# Altium PCB PCB1.PcbDoc
Units mm, origin at the board's own origin, x right, y up, seen from the top; angles counter-clockwise.
Board outline 56.77 x 39.37 mm, 2 copper layers (Top Layer, Bottom Layer); 26 components, 17 nets, 96 pads, 7 vias.
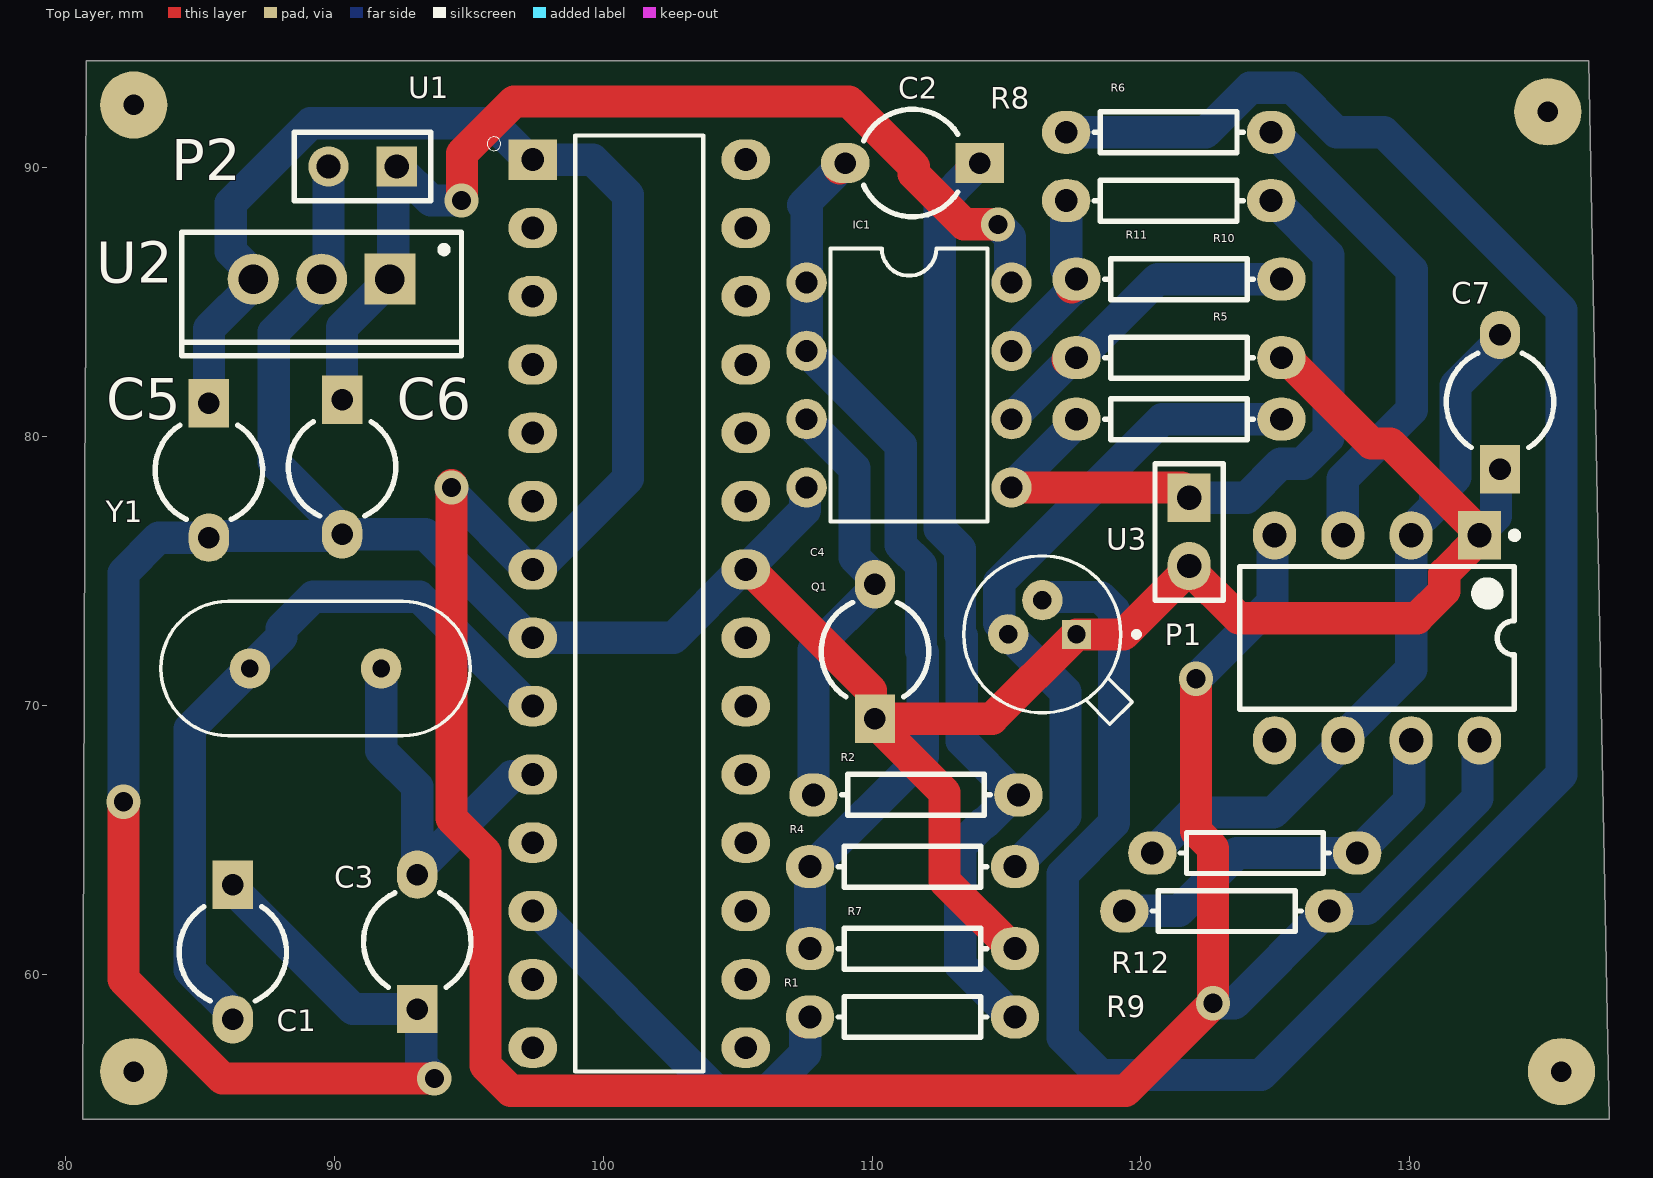
[diagram p0: Top Layer view]
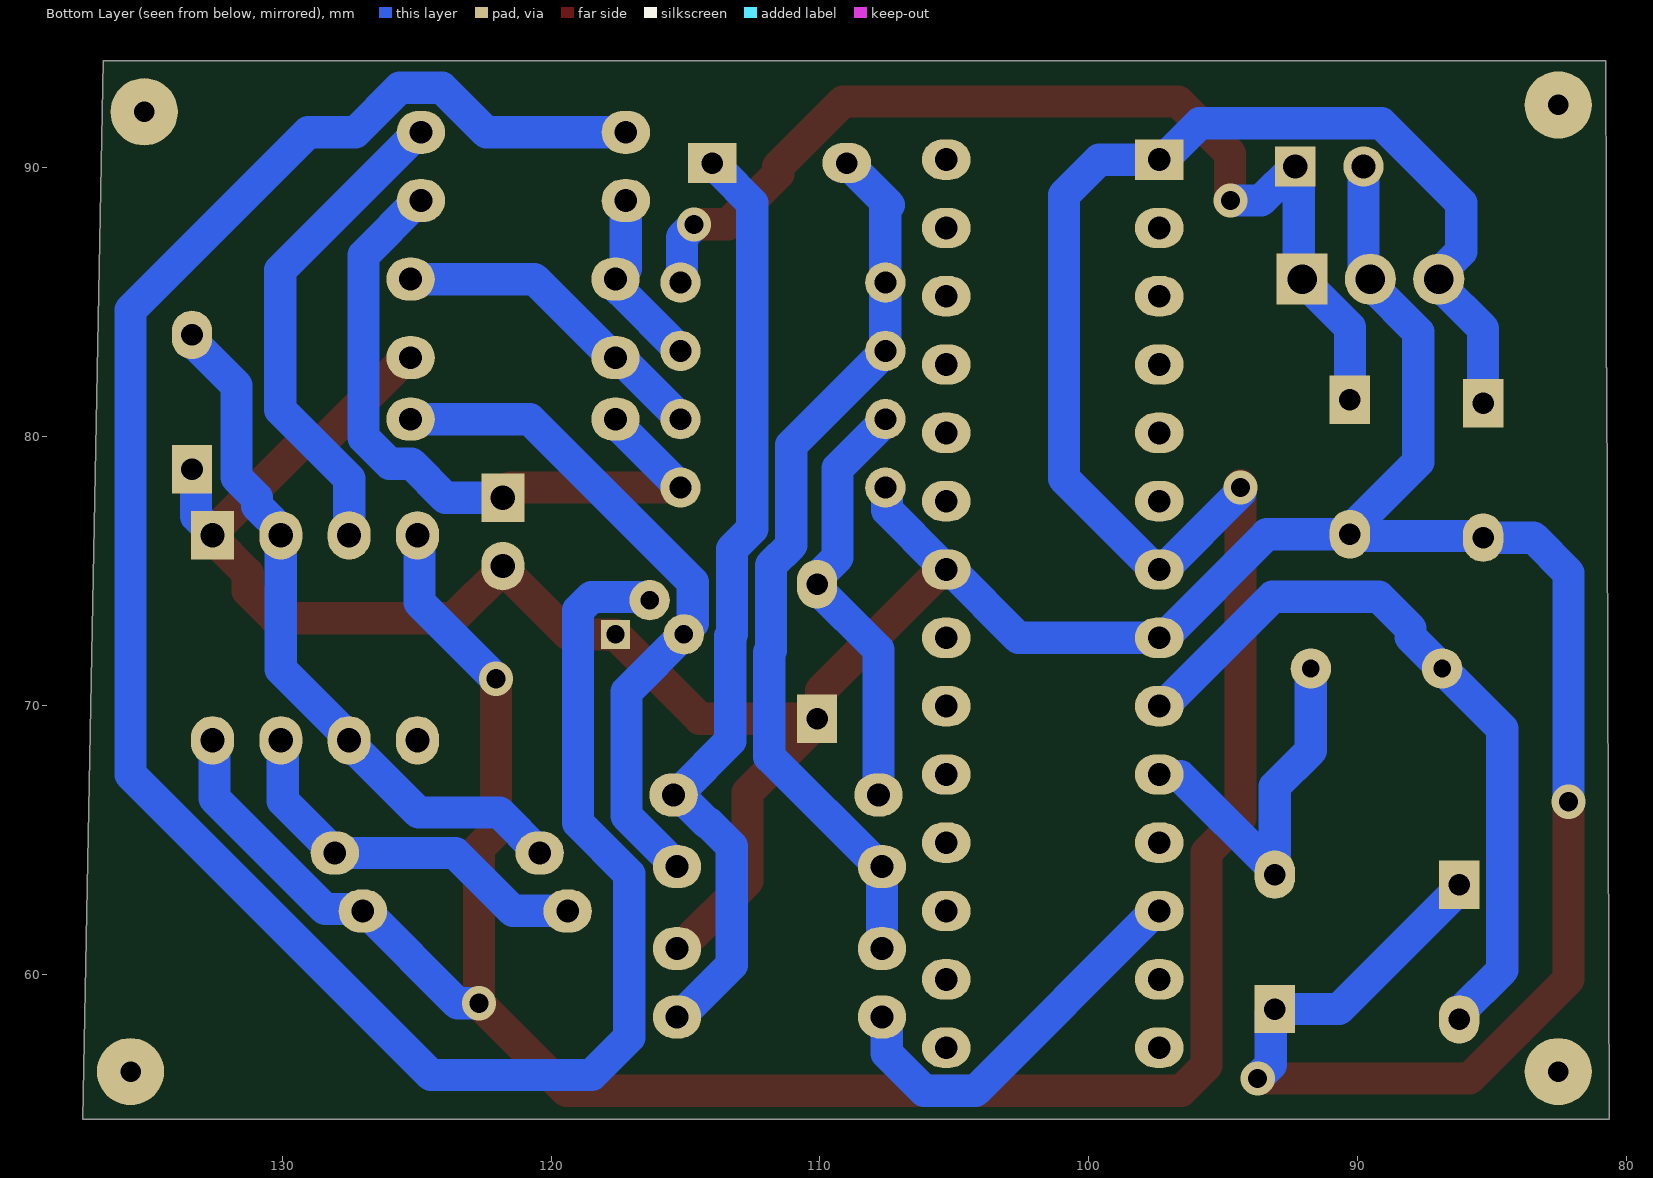
[diagram p1: Bottom Layer view, seen from below]

## Layer stack, top to bottom
Top Solder: solder mask 0.0102, Solder Resist, Dk 3.5
Top Layer: signal copper 0.0356
Dielectric 1: dielectric 0.32, FR-4, Dk 4.8
Bottom Layer: signal copper 0.0356
Bottom Solder: solder mask 0.0102, Solder Resist, Dk 3.5

## Board outline
80.757,88.392 80.757,82.565 80.738,82.55 80.647,54.61 137.419,54.61 136.657,93.98 80.775,93.98

## Design rules (kind name [scope] priority, off if disabled: settings)
Clearance [All] p1: gap=0.254 ignorepadtopadclearanceinfootprint=FALSE except(0: Arc-Hole Track-Hole SMDPad-Hole THPad-Hole Via-Hole Fill-Hole Poly-Hole Region-Hole Text-Hole)
PolygonConnect [All] p1: connectstyle=Relief reliefconductorwidth=0.254 reliefentries=4 polygonreliefangle="90 Angle" airgapwidth=0.254
RoutingVias [All] p1: holewidth=0.711 width=1.27 viastyle="Through Hole" minholewidth=0.711 minwidth=1.27 maxholewidth=0.711 maxwidth=1.27
SolderMaskExpansion [All] p1: expansion=0.102 istentingtop=FALSE
Width [All] p1: maxlimit=1.2 minlimit=1.2 preferedwidth=1.2
30 further rules are at their usual default settings.

## Components (designator, comment, footprint, x,y, rotation, side; value= is the part's Value field where it differs from the comment)
C1 "Cap2" CAPR5-4X5 86.233,60.833 r270 top value=22pF
C2 "Cap2" CAPR5-4X5 111.506,90.17 r180 top value=1uF
C3 "Cap2" CAPR5-4X5 93.091,61.214 r90 top value=22pF
C4 "Cap2" CAPR5-4X5 110.109,72.009 r90 top value=1uF
C5 "Cap2" CAPR5-4X5 85.344,78.74 r270 top value=100nF
C6 "Cap2" CAPR5-4X5 90.297,78.867 r270 top value=330nF
C7 "Cap2" CAPR5-4X5 133.35,81.28 r90 top value=10nF
IC1 "LM358" *DIL08 111.379,81.915 r270 top
P1 "Header 2" HDR1X2#1 121.793,77.724 r270 top
P2 "Header 2" HDR1X2#2 92.329,90.043 r180 top
Q1 "2N2222" TO127P584H533-3 116.332,72.644 r180 top
R1 "Res1" AXIAL-0.3 111.506,58.42 r0 top value=33K
R2 "Res1" AXIAL-0.3 111.633,66.675 r180 top value=33K
R4 "Res1" AXIAL-0.3 111.506,64.008 r0 top value=1K
R5 "Res1" AXIAL-0.3 121.412,80.645 r180 top value=1K
R6 "Res1" AXIAL-0.3 121.031,88.773 r180 top value=1K
R7 "Res1" AXIAL-0.3 111.506,60.96 r180 top value=1K
R8 "Res1" AXIAL-0.3 121.031,91.313 r180 top value=100
R9 "Res1" AXIAL-0.3 123.19,62.357 r0 top value=1K
R10 "Res1" AXIAL-0.3 121.412,82.931 r180 top value=1K
R11 "Res1" AXIAL-0.3 121.412,85.852 r180 top value=1K
R12 "Res1" AXIAL-0.3 124.231,64.516 r0 top value=750K
U1 "ATMEGA328P-PU" DIP794W46P254L2967H457Q28B 101.346,73.787 r0 top
U2 "L7805CV" TO220 89.535,85.852 r180 top
U3 "NE555P" P0008A 128.778,72.517 r270 top
Y1 "ABL-16.000MHZ-T" XTAL_HC49P488W46L1150T500H350 89.308,71.374 r180 top

## Footprints (in the part's own frame and the unit in brackets; to place one, negate y for a bottom-side part, rotate by r counter-clockwise, add the part's x,y. Pads: shape width x height; smd on the part's side, far side on the other; paste and mask are expansions set on the pad)
*DIL08 [mm]
  round 1.5 hole 0.813: 1(-3.81,-3.81) 2(-1.27,-3.81) 3(1.27,-3.81) 4(3.81,-3.81) 5(3.81,3.81) 6(1.27,3.81) 7(-1.27,3.81) 8(-3.81,3.81)
  silkscreen extent -5.08,-2.92 5.08,2.92
AXIAL-0.3 [mm] "Axial Device, Thru-Hole; 2 Leads; 0.3 in Pin Spacing"
  oval 1.8x1.6 hole 0.85: 1(-3.81,0) 2(3.81,0)
  silkscreen extent -2.77,-0.76 2.77,0.76
CAPR5-4X5 [mm] "Capacitor; 2 Leads"
  rect 1.8x1.5 hole 0.8: 1(-2.5,0)
  oval 1.8x1.5 hole 0.8: 2(2.5,0)
  silkscreen extent -1.69,-2 1.82,2
DIP794W46P254L2967H457Q28B [mm]
  rect 1.8x1.5 hole 0.85: 1(-3.96,16.51)
  oval 1.8x1.5 hole 0.85: 2(-3.96,13.97) 3(-3.96,11.43) 4(-3.96,8.89) 5(-3.96,6.35) 6(-3.96,3.81) 7(-3.96,1.27) 8(-3.96,-1.27) 9(-3.96,-3.81) 10(-3.96,-6.35) 11(-3.96,-8.89) 12(-3.96,-11.43) 13(-3.96,-13.97) 14(-3.96,-16.51) 15(3.96,-16.51) 16(3.96,-13.97) 17(3.96,-11.43) 18(3.96,-8.89) 19(3.96,-6.35) 20(3.96,-3.81) 21(3.96,-1.27) 22(3.96,1.27) 23(3.96,3.81) 24(3.96,6.35) 25(3.96,8.89) 26(3.96,11.43) 27(3.96,13.97) 28(3.96,16.51)
  silkscreen extent -5.65,-17.4 2.38,17.4
HDR1X2#1 [mm] "Connector; Header; 2 Position"
  rect 1.8x1.6 hole 0.9: 1(0,0)
  oval 1.8x1.6 hole 0.9: 2(2.54,0)
  silkscreen extent -1.27,-1.27 3.81,1.27
HDR1X2#2 [mm] "Connector; Header; 2 Position"
  rect 1.5x1.5 hole 0.9: 1(0,0)
  round 1.5 hole 0.9: 2(2.54,0)
  silkscreen extent -1.27,-1.27 3.81,1.27
P0008A [mm] "DIP, 8-Leads, Body 10.15x6.6mm, Pitch 2.54mm"
  rect 1.8x1.6 hole 0.9: 1(-3.81,3.81)
  oval 1.8x1.6 hole 0.9: 2(-3.81,1.27) 3(-3.81,-1.27) 4(-3.81,-3.81) 5(3.81,-3.81) 6(3.81,-1.27) 7(3.81,1.27) 8(3.81,3.81)
  silkscreen extent -3.93,-5.1 2.65,5.24, body extent -3.95,-5.07 3.95,5.07, height 5.08
TO127P584H533-3 [mm]
  rect 1.08x1.08 hole 0.68: 1(-1.27,0)
  round 1.5 hole 0.68: 2(0,-1.27) 3(1.27,0)
  silkscreen extent -3.6,-2.92 2.92,3.34
TO220 [mm] "TO, Thru-Hole, Vertical, Heatsink Mounted; 3 In-Line Leads; Pitch 2.54 mm"
  rect 1.9x1.9 hole 1.1: 1(-2.54,0)
  round 1.9 hole 1.1: 2(0,0) 3(2.54,0)
  silkscreen extent -5.2,-1.75 5.2,2.85, body extent -5.25,-1.8 5.25,2.9, height 19.7
XTAL_HC49P488W46L1150T500H350 [mm]
  round 1.5 hole 0.657: 1(-2.44,0) 2(2.44,0)
  silkscreen extent -5.75,-2.5 5.75,2.5, body extent -5.75,-3.25 5.75,5.75, height 2.5

## Part data
C1 C2 C3 C4 C5 C6 C7: "Capacitor", PackageDescription="Capacitor; 2 Leads", PackageReference=CAPR5-4X5, Published=23-Sep-2002, Publisher="Altium Limited"
IC1: "Op Amp Dual Low Power Amplifier Â±16V/32V 8-Pin TO-99 Tube", Package=None, Availability="In Stock", Check_prices=https://www.snapeda.com/parts/LM358/Texas+Instruments/view-part/?ref=eda, MF="Texas Instruments", MP=LM358, Price=None, Purchase-URL=https://pricing.snapeda.com/search/part/LM358/?ref=eda, SnapEDA_Link=https://www.snapeda.com/parts/LM358/Texas+Instruments/view-part/?ref=snap
P1 P2: "Header, 2-Pin", LatestRevisionDate=17-Jul-2002, LatestRevisionNote="Re-released for DXP Platform.", Publisher="Altium Limited"
Q1: "Bipolar (BJT) Transistor NPN 50V 800mA 500mW Through Hole TO-18 (TO-206AA)", Package="TO-18 Texas Instruments", Availability=Bad, BuyPart=h, MF="ON Semiconductor", MP=2N2222, Price=None, SnapEDA_Link=https://www.snapeda.com/parts/2N2222/ON%20Semiconductor/view-part/884681/?ref=snap
R1 R2 R4 R5 R6 R7 R8 R9 R10 R11 R12: "Resistor", LatestRevisionDate=17-Jul-2002, LatestRevisionNote="Re-released for DXP Platform.", PackageDescription="Axial Device, Thru-Hole; 2 Leads; 0.3 in Pin Spacing", PackageReference=AXIAL-0.3, Published=8-Jun-2000, Publisher="Altium Limited"
U1: "ATmega Series 20 MHz 32 KB Flash 2 KB SRAM 8-Bit Microcontroller - DIP-28", Package=None, Availability=Unavailable, MP=ATMEGA328P-PU, Price=None
U2: library part CMP-0244-00483-1, "Positive Voltage Regulator, 5V, 3-Pin TO-220", ComponentLink1Description="Manufacturer URL", ComponentLink1URL=http://www.st.com, ComponentLink2Description=Datasheet, ComponentLink2URL=http://www.st.com/internet/com/TECHNICAL_RESOURCES/TECHNICAL_LITERATURE/DATASHEET/CD00000444.pdf, ComponentLink3Description="Package Specification", ComponentLink3URL=http://www.st.com/internet/com/TECHNICAL_RESOURCES/TECHNICAL_LITERATURE/PACKAGE_INFORMATION/CD00004649.pdf, DatasheetVersion=16/11/2011, PackageDescription="TO, Thru-Hole, Vertical, Heatsink Mounted; 3 In-Line Leads; Pitch 2.54 mm", PackageReference=TO220, PackageVersion=ver3.0
U3: library part CMP-2000-04954-1, "Precision Timer, 4.5 to 16 V, 0 to 70 degC, 8-Pin DIP, Pb-Free, Tube", Manufacturer=TexasInstruments, Maximum High Level Output Current=-200mA, Maximum Low Level Output Current=200mA, Operating Supply Voltage=5, Package=8PDIP, Package Description="8-Pin Double In-line Package, Body 9.59 x 6.35 mm, Pitch 2.54 mm", Package Reference=P8, Category=Timer, Datasheet URL=http://www.ti.com/general/docs/lit/getliterature.tsp?genericPartNumber=NE555&fileType=pdf, Datasheet Version="Rev. I, 09/2014", Manufacturer URL=http://www.ti.com/, Number of Internal Timers=1, Package URL=http://www.ti.com/lit/ml/mpdi001b/mpdi001b.pdf, Packaging=Rail/Tube, Rad Hard=No, Type=Standard
Y1: "16 MHz Â±10ppm Crystal 18pF 40 Ohms HC-49/US", Package=None, Availability="In Stock", Check_prices=https://www.snapeda.com/parts/ABL-16.000MHZ/Abracon/view-part/?ref=eda, MF="Abracon Corporation", MP=ABL-16.000MHZ, Price=None, Purchase-URL=https://pricing.snapeda.com/search/part/ABL-16.000MHZ/?ref=eda, SnapEDA_Link=https://www.snapeda.com/parts/ABL-16.000MHZ/Abracon/view-part/?ref=snap

## Free pads (board coordinates)
  round 2.5 hole 0.762: 3(82.55,92.329) 4(82.55,56.388) 5(135.636,56.388) 6(135.128,92.075)

## Via types
v1: diameter 1.27, hole 0.711, Top Layer to Bottom Layer, 7 vias

## Nets (pads, with @x,y where several pads share a name; then routed paths per layer and width w, separated by ;. In a path a pad name is that pad's centre, name@x,y a point inside that pad or via, vN(x,y) a via of type N, cw(c..) or ccw(c..) an arc to the next point about the centre after c; other vN are vias at no path point)
5V: C5.1 R9.2 U1.1 U1.7 U2.3 U3.4 U3.8 | length 130.5
  Top Layer w1.2: C5.1 C5.1@85.344,81.39 ; v1@94.361,78.185 v1(94.361,78.105) 94.361,65.804 95.632,64.533 95.632,63.113 95.632,56.613 96.572,55.673 104.492,55.673 119.427,55.673 v1(122.682,58.928) 122.682,64.694 122.047,65.329 v1(122.047,70.993)
  Bottom Layer w1.2: C5.1 85.344,84.012 86.995,85.663 U2.3 86.995,86.041 86.159,86.877 86.159,88.681 89.125,91.647 95.886,91.647 97.236,90.297 U1.1 99.612,90.297 100.924,88.986 100.924,78.445 97.536,75.057 U1.7 97.236,75.057 94.374,77.919 94.374,78.092 v1(94.361,78.105) ; v1(122.047,70.993) 124.891,73.837 124.891,76.25 U3.4 ; v1(122.682,58.928) 123.471,58.928 126.9,62.357 R9.2 127.077,62.434 128.398,62.434 132.511,66.547 132.511,68.63 U3.8
GND: C1.1 C3.1 C4.1 C5.2 C6.2 C7.1 IC1.4 P1.2 P2.2 Q1.1 R7.1 R10.1 U1.8 U1.22 U2.2 U3.1 | length 144.7
  Top Layer w1.2: v1(82.169,66.421) 82.169,59.817 85.852,56.134 v1(93.726,56.134) ; U1.8@97.236,72.517 U1.8 ; U1.22 105.456,75.057 109.959,70.554 109.959,69.659 C4.1 ; R7.1 115.216,60.96 112.699,63.477 112.699,66.769 110.109,69.359 C4.1 ; P1.2 P1.2@121.793,75.084 ; R10.1 125.375,82.931 128.565,79.741 129.274,79.741 132.588,76.427 U3.1 132.588,76.227 131.278,74.917 131.278,74.255 130.269,73.246 123.631,73.246 P1.2@121.793,75.084 ; C4.1 114.467,69.509 Q1.1 119.353,72.644 P1.2@121.793,75.084
  Bottom Layer w1.2: v1(82.169,66.421) 82.169,74.93 83.479,76.24 C5.2 85.407,76.303 90.233,76.303 C6.2 ; C1.1 86.233,63.183 90.702,58.714 C3.1 93.241,58.564 93.241,56.638 93.726,56.153 v1(93.726,56.134) ; P2.2 89.789,86.295 89.535,86.041 U2.2 89.535,85.663 87.757,83.885 87.757,79.057 90.297,76.517 C6.2 ; IC1.4@107.429,78.092 IC1.4@107.442,78.105 ; IC1.4 107.512,78.048 107.512,77.263 105.513,75.264 105.513,75.196 105.375,75.057 U1.22 105.156,75.057 102.616,72.517 U1.8 97.236,72.517 93.386,76.367 C6.2 ; U3.1 132.588,76.427 133.2,77.039 133.2,78.63 C7.1
NetC1_2: C1.2 U1.9 Y1.2 | length 28.5
  Top Layer w1.2: C1.2 C1.2@86.233,58.483 ; U1.9@97.155,69.977 U1.9
  Bottom Layer w1.2: C1.2 86.233,58.564 84.629,60.168 84.629,69.135 Y1.2 88.045,72.551 88.045,72.864 89.222,74.041 93.172,74.041 97.236,69.977 U1.9
NetC2_1: C2.1 R1.2 R2.1 | length 35.6
  Top Layer w1.2: C2.1@113.706,90.02 113.856,90.17 C2.1 ; R2.1@115.235,66.675 R2.1
  Bottom Layer w1.2: C2.1@113.706,90.02 113.706,89.87 112.522,88.686 112.522,76.571 113.274,75.819 113.274,72.647 113.341,72.58 113.341,68.677 115.212,66.806 115.312,66.806 R2.1 ; R1.2@115.216,58.42 113.284,60.352 113.284,64.77 114.133,65.619 114.178,65.619 R2.1@115.235,66.675
NetC2_2: C2.2 IC1.1 IC1.2 R4.1 R7.2 | length 33.5
  Top Layer w1.2: R4.1 R4.1@107.796,64.008 ; C2.2@108.799,89.963 108.799,90.031 108.937,90.17 C2.2
  Bottom Layer w1.2: R7.2 R4.1 ; R4.1@107.796,64.008 111.887,68.099 111.887,71.978 111.82,72.045 111.82,75.216 111.068,75.968 111.068,79.686 IC1.2 IC1.1 107.569,88.479 107.442,88.606 C2.2@108.799,89.963
NetC3_2: C3.2 U1.10 Y1.1 | length 14
  Bottom Layer w1.2: Y1.1 91.748,68.331 93.091,66.988 C3.2@93.091,63.864 ; C3.2 C3.2@93.091,63.864 ; U1.10 97.329,67.38 96.607,67.38 C3.2@93.091,63.864
NetC4_2: C4.2 IC1.3 R2.2 | length 16
  Top Layer w1.2: IC1.3@107.442,80.626 107.442,80.645 IC1.3@107.461,80.645 ; C4.2@110.109,74.359 C4.2 C4.2@110.109,74.74
  Bottom Layer w1.2: IC1.3 107.569,80.595 109.347,78.817 109.347,75.502 C4.2@110.109,74.74 ; R2.2 107.823,72.073 C4.2@110.109,74.359
NetC7_2: C7.2 R12.1 U3.2 U3.6 | length 26.4
  Top Layer w1.2: R12.1 R12.1@120.421,64.524 ; C7.2 C7.2@133.393,83.823
  Bottom Layer w1.2: R12.1@120.421,64.524 121.918,66.021 124.922,66.021 127.508,68.607 U3.6 127.508,68.807 130.048,71.347 U3.2 130.048,76.535 130.934,77.421 130.934,77.721 131.699,78.486 131.699,81.898 133.35,83.549 C7.2
NetIC1_5: IC1.5 P1.1 R5.2 R6.1 | length 26.3
  Top Layer w1.2: IC1.5 121.512,78.105 121.793,77.824 P1.1 ; R6.1 R6.1@124.941,88.773
  Bottom Layer w1.2: IC1.5@115.062,78.105 IC1.5@115.062,78.124 ; IC1.5 117.425,80.341 117.425,80.468 R5.2 R5.2@117.583,80.645 ; P1.1 123.926,77.724 125.193,78.991 126.007,78.991 126.976,79.96 126.976,86.738 R6.1@124.941,88.773
NetIC1_6: IC1.6 R10.2 R11.1 | length 12.6
  Top Layer w1.2: R10.2@117.271,82.854 117.525,82.854 R10.2 R10.2@117.702,82.931
  Bottom Layer w1.2: IC1.6 115.189,80.671 117.449,82.931 R10.2 ; R10.2@117.702,82.931 120.623,85.852 R11.1
NetIC1_7: IC1.7 R6.2 R11.2 | length 7.1
  Top Layer w1.2: R11.2@117.425,85.548 117.425,85.675 R11.2
  Bottom Layer w1.2: IC1.7 117.425,85.421 117.425,85.675 R11.2 117.602,85.86 117.221,86.241 R6.2
NetQ1_2: Q1.2 R8.2 | length 83.1
  Bottom Layer w1.2: Q1.2 116.584,73.914 116.708,74.038 118.496,74.038 118.996,73.538 118.996,65.64 117.094,63.738 117.094,57.658 118.491,56.261 124.46,56.261 135.636,67.437 135.636,84.709 129.032,91.313 127.28,91.313 125.626,92.967 124.056,92.967 122.402,91.313 R8.2
NetQ1_3: Q1.3 R4.2 R5.1 | length 25.4
  Top Layer w1.2: R4.2 R4.2@115.316,64.016
  Bottom Layer w1.2: R4.2@115.316,64.016 117.197,65.897 117.197,70.509 114.964,72.742 115.005,72.783 114.728,73.059 114.728,74.578 120.795,80.645 R5.1
NetR1_1: R1.1 U1.12 | length 14.9
  Top Layer w1.2: U1.12 U1.12@97.536,62.357 ; R1.1@107.519,58.243 R1.1
  Bottom Layer w1.2: U1.12@97.536,62.357 104.22,55.673 106.12,55.673 107.519,57.072 R1.1@107.519,58.243
NetR8_1: R8.1 U3.3 | length 18.3
  Top Layer w1.2: R8.1 R8.1@124.941,91.313
  Bottom Layer w1.2: R8.1@124.941,91.313 130.064,86.19 130.064,80.992 127.508,78.436 U3.3
NetR9_1: R9.1 R12.2 U3.7 | length 14.6
  Top Layer w1.2: R9.1 R9.1@119.388,62.365 ; R12.2 R12.2@128.041,64.524
  Bottom Layer w1.2: R9.1@119.388,62.365 121.412,62.365 123.563,64.516 R12.2 ; R12.2@128.041,64.524 129.971,66.454 129.971,68.63 U3.7
VCC: C6.1 IC1.8 P2.1 U2.1 | length 39.4
  Top Layer w1.2: v1(94.742,88.773) 94.755,88.786 94.755,90.524 96.687,92.456 109.138,92.456 111.557,90.037 111.557,89.761 113.421,87.897 114.668,87.897 v1(114.681,87.884)
  Bottom Layer w1.2: C6.1 90.297,84.063 91.725,85.491 91.725,85.502 U2.1 92.202,85.979 92.202,89.916 P2.1 93.599,88.773 v1(94.742,88.773) ; v1(114.681,87.884) 114.681,87.865 115.132,87.414 115.132,85.782 IC1.8 ; IC1.8@115.049,85.738 IC1.8@115.062,85.725
pads on no net: U1.2 U1.3 U1.4 U1.5 U1.6 U1.11 U1.13 U1.14 U1.15 U1.16 U1.17 U1.18 U1.19 U1.20 U1.21 U1.23 U1.24 U1.25 U1.26 U1.27 U1.28 U3.5